# Altium PCB Board ZIP Socket.PcbDoc
Units mm, origin at the board's own origin, x right, y up, seen from the top; angles counter-clockwise.
Board outline 200 x 100 mm, 2 copper layers (Top Layer, Bottom Layer); 42 components, 40 nets, 80 pads, 0 vias.
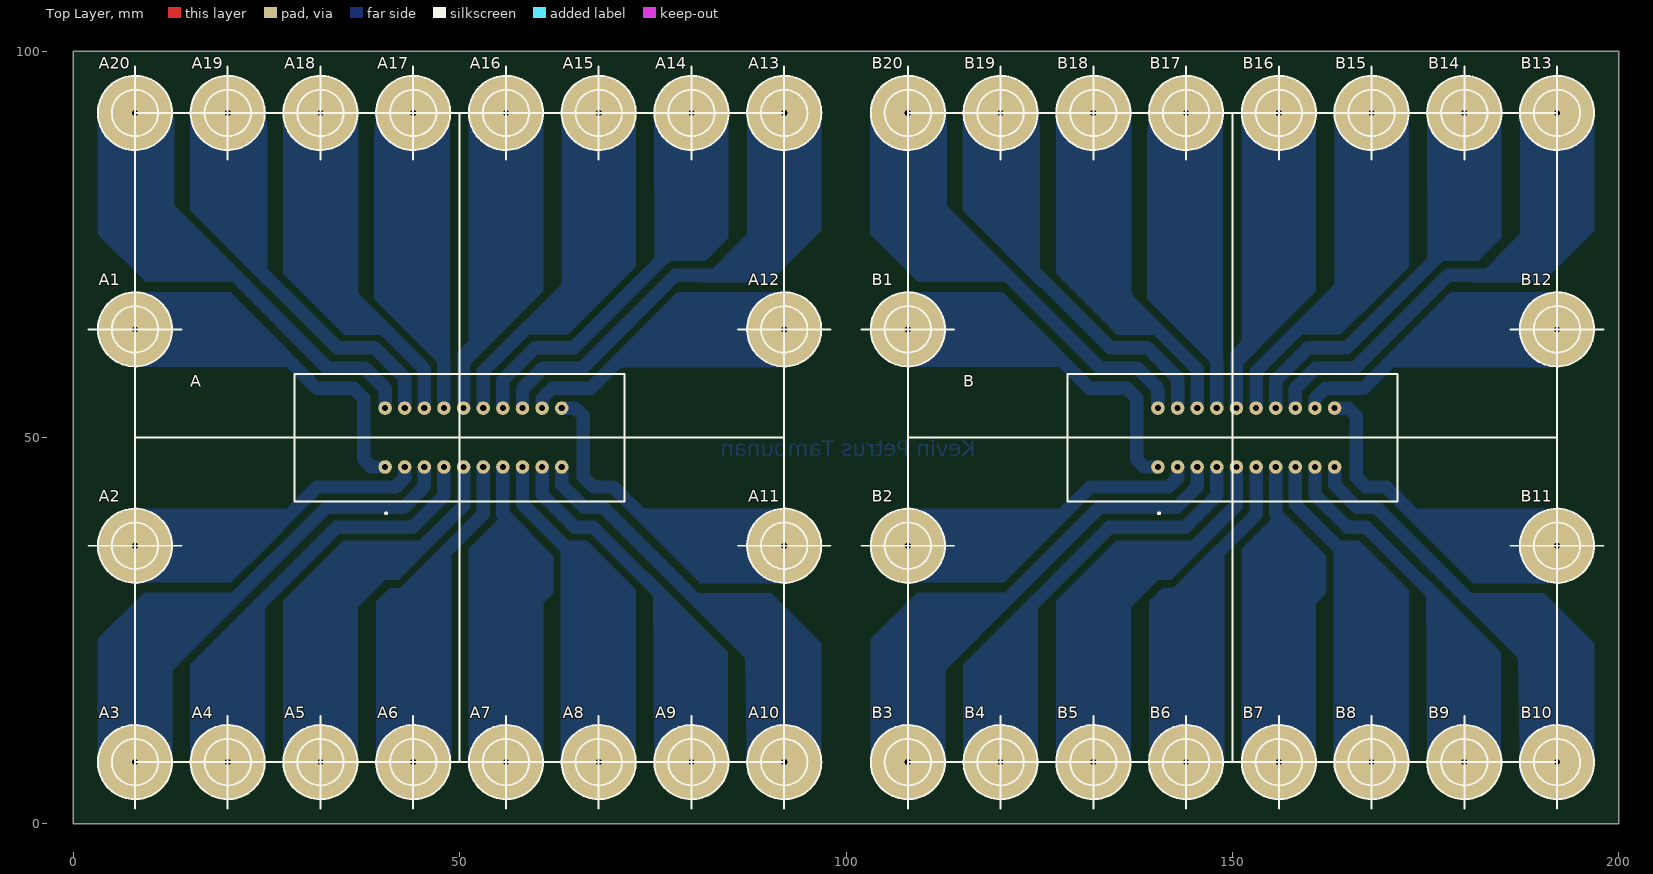
[diagram p0: Top Layer view]
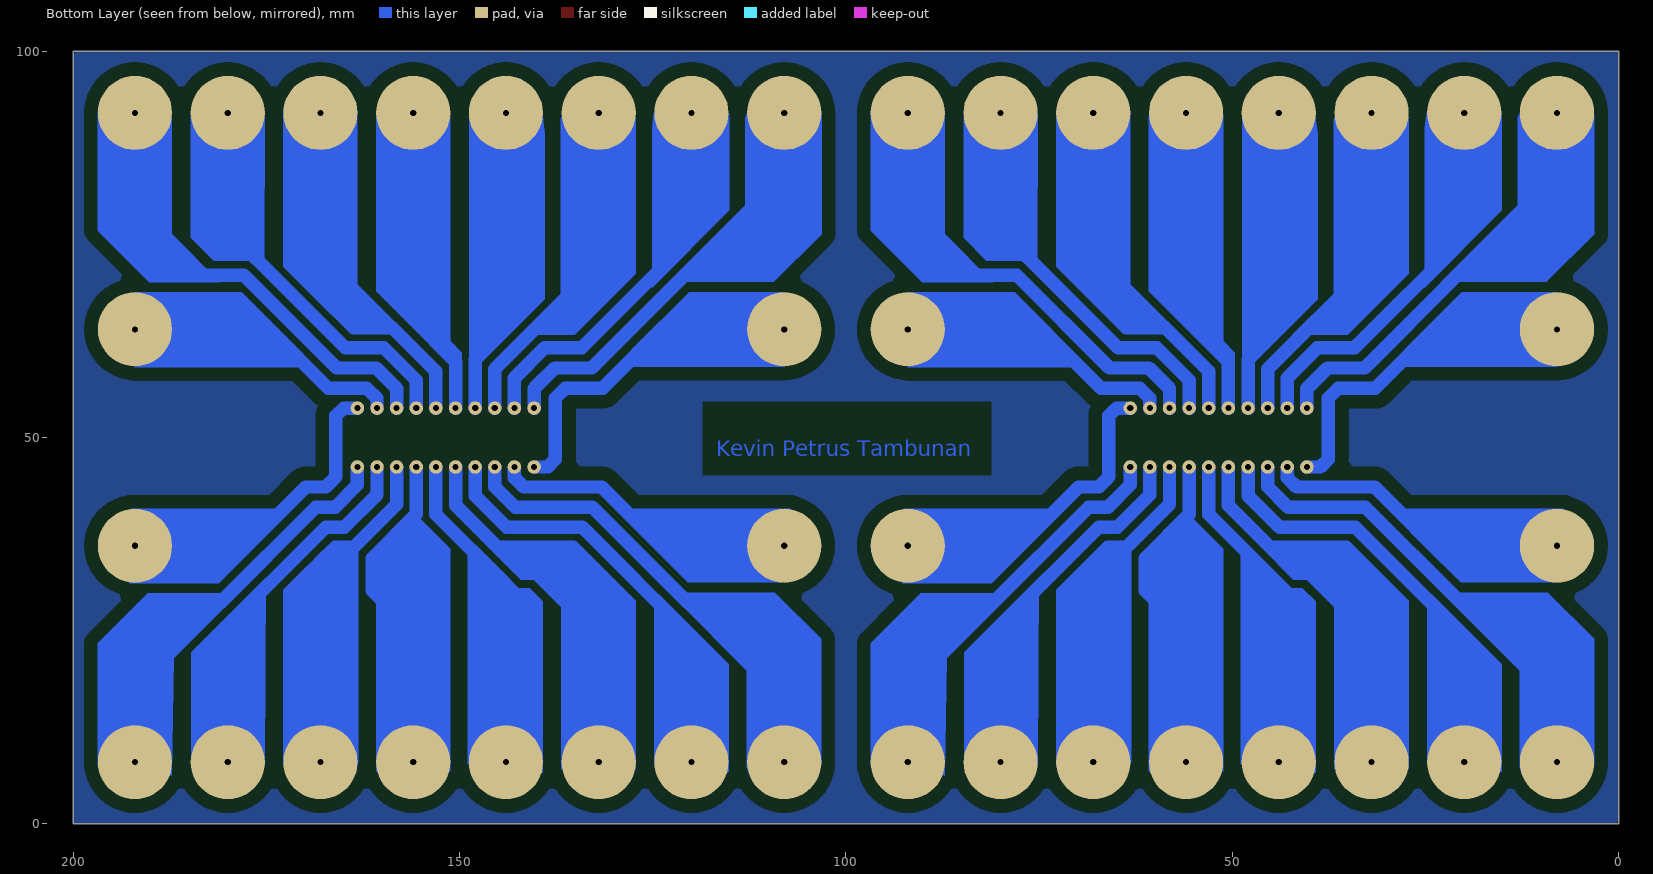
[diagram p1: Bottom Layer view, seen from below]

## Layer stack, top to bottom
Top Solder: solder mask 0.0102, Solder Resist, Dk 3.5
Top Layer: signal copper 0.0356
Dielectric 1: dielectric 0.32, FR-4, Dk 4.8
Bottom Layer: signal copper 0.0356
Bottom Solder: solder mask 0.0102, Solder Resist, Dk 3.5

## Board outline
0,0 200,0 200,100 0,100

## Design rules (kind name [scope] priority, off if disabled: settings)
Clearance [All] p1: gap=1.75 ignorepadtopadclearanceinfootprint=FALSE
PolygonConnect [All] p1: connectstyle=Relief reliefconductorwidth=0.254 reliefentries=4 polygonreliefangle="90 Angle" airgapwidth=0.254
RoutingVias [All] p1: holewidth=0.711 width=1.27 viastyle="Through Hole" minholewidth=0.711 minwidth=1.27 maxholewidth=0.711 maxwidth=1.27
SolderMaskExpansion [All] p1: expansion=0.102
Width [All] p1: maxlimit=0.254 minlimit=0.254 preferedwidth=0.254
30 further rules are at their usual default settings.

## Components (designator, comment, footprint, x,y, rotation, side; value= is the part's Value field where it differs from the comment)
A "220-3342-00-0602J" 3M_0_0 50,50 r180 top locked
A1 "Female_Connector_Banana" F_BANANA 8,64 r0 top locked
A2 "Female_Connector_Banana" F_BANANA 8,36 r0 top locked
A3 "Female_Connector_Banana" F_BANANA 8,8 r0 top locked
A4 "Female_Connector_Banana" F_BANANA 20,8 r0 top locked
A5 "Female_Connector_Banana" F_BANANA 32,8 r0 top locked
A6 "Female_Connector_Banana" F_BANANA 44,8 r0 top locked
A7 "Female_Connector_Banana" F_BANANA 56,8 r0 top locked
A8 "Female_Connector_Banana" F_BANANA 68,8 r0 top locked
A9 "Female_Connector_Banana" F_BANANA 80,8 r0 top locked
A10 "Female_Connector_Banana" F_BANANA 92,8 r0 top locked
A11 "Female_Connector_Banana" F_BANANA 92,36 r0 top locked
A12 "Female_Connector_Banana" F_BANANA 92,64 r0 top locked
A13 "Female_Connector_Banana" F_BANANA 92,92 r0 top locked
A14 "Female_Connector_Banana" F_BANANA 80,92 r0 top locked
A15 "Female_Connector_Banana" F_BANANA 68,92 r0 top locked
A16 "Female_Connector_Banana" F_BANANA 56,92 r0 top locked
A17 "Female_Connector_Banana" F_BANANA 44,92 r0 top locked
A18 "Female_Connector_Banana" F_BANANA 32,92 r0 top locked
A19 "Female_Connector_Banana" F_BANANA 20,92 r0 top locked
A20 "Female_Connector_Banana" F_BANANA 8,92 r0 top locked
B "220-3342-00-0602J" 3M_0_0 150,50 r180 top locked
B1 "Female_Connector_Banana" F_BANANA 108,64 r0 top locked
B2 "Female_Connector_Banana" F_BANANA 108,36 r0 top locked
B3 "Female_Connector_Banana" F_BANANA 108,8 r0 top locked
B4 "Female_Connector_Banana" F_BANANA 120,8 r0 top locked
B5 "Female_Connector_Banana" F_BANANA 132,8 r0 top locked
B6 "Female_Connector_Banana" F_BANANA 144,8 r0 top locked
B7 "Female_Connector_Banana" F_BANANA 156,8 r0 top locked
B8 "Female_Connector_Banana" F_BANANA 168,8 r0 top locked
B9 "Female_Connector_Banana" F_BANANA 180,8 r0 top locked
B10 "Female_Connector_Banana" F_BANANA 192,8 r0 top locked
B11 "Female_Connector_Banana" F_BANANA 192,36 r0 top locked
B12 "Female_Connector_Banana" F_BANANA 192,64 r0 top locked
B13 "Female_Connector_Banana" F_BANANA 192,92 r0 top locked
B14 "Female_Connector_Banana" F_BANANA 180,92 r0 top locked
B15 "Female_Connector_Banana" F_BANANA 168,92 r0 top locked
B16 "Female_Connector_Banana" F_BANANA 156,92 r0 top locked
B17 "Female_Connector_Banana" F_BANANA 144,92 r0 top locked
B18 "Female_Connector_Banana" F_BANANA 132,92 r0 top locked
B19 "Female_Connector_Banana" F_BANANA 120,92 r0 top locked
B20 "Female_Connector_Banana" F_BANANA 108,92 r0 top locked

## Footprints (in the part's own frame and the unit in brackets; to place one, negate y for a bottom-side part, rotate by r counter-clockwise, add the part's x,y. Pads: shape width x height; smd on the part's side, far side on the other; paste and mask are expansions set on the pad)
3M_0_0 [mm]
  round 1.75 hole 0.8 paste-1000 mask+0: 1(9.64,3.81) 2(7.1,3.81) 3(4.56,3.81) 4(2.02,3.81) 5(-0.52,3.81) 6(-3.06,3.81) 7(-5.6,3.81) 8(-8.14,3.81) 9(-10.68,3.81) 10(-13.22,3.81) 11(-13.22,-3.81) 12(-10.68,-3.81) 13(-8.14,-3.81) 14(-5.6,-3.81) 15(-3.06,-3.81) 16(-0.52,-3.81) 17(2.02,-3.81) 18(4.56,-3.81) 19(7.1,-3.81) 20(9.64,-3.81)
  silkscreen extent -21.35,-8.25 21.35,9.92, body extent -20.2,-7.62 20.2,7.6, height 24.39
F_BANANA [mm]
  round 9.6 hole 0.8: 1(0,0)
  silkscreen extent -4.8,-4.8 4.8,4.8

## Nets (pads, with @x,y where several pads share a name; then routed paths per layer and width w, separated by ;. In a path a pad name is that pad's centre, name@x,y a point inside that pad or via, vN(x,y) a via of type N, cw(c..) or ccw(c..) an arc to the next point about the centre after c; other vN are vias at no path point)
NetA1_1: A1.1 A.1 | length 44.4
  Bottom Layer w1.74: A1.1 23.9,64 31.5,56.4 36.3,56.4 37.6,55.1 37.6,47.2 38.61,46.19 A.1
NetA2_1: A2.1 A.2 | length 39.9
  Bottom Layer w1.74: A2.1 24,36 31.6,43.6 41.7,43.6 42.9,44.8 A.2
NetA3_1: A3.1 A.3 | length 66.2
  Bottom Layer w1.74: A3.1 8,27.5 9.1,28.6 20.4,28.6 32.8,41 42.8,41 45.44,43.64 A.3
NetA4_1: A4.1 A.4 | length 55.5
  Bottom Layer w1.74: A4.1 20,24.3 34.1,38.4 43.9,38.4 47.98,42.48 A.4
NetA5_1: A5.1 A.5 | length 51.6
  Bottom Layer w1.74: A5.1 32,32.5 35.3,35.8 45.1,35.8 50.52,41.22 A.5
NetA6_1: A6.1 A.6 | length 41.9
  Bottom Layer w1.74: A6.1 44,31 53.06,40.06 A.6
NetA7_1: A7.1 A.7 | length 42.7
  Bottom Layer w1.74: A.7 55.6,40.1 61.3,34.4 61.3,30.2 56,24.9 A7.1
NetA8_1: A8.1 A.8 | length 43.7
  Bottom Layer w1.74: A.8 58.14,41.36 63.7,35.8 66.1,35.8 68,33.9 A8.1
NetA9_1: A9.1 A.9 | length 47.6
  Bottom Layer w1.74: A.9 60.68,42.62 64.9,38.4 67.3,38.4 80,25.7 A9.1
NetA10_1: A10.1 A.10 | length 57
  Bottom Layer w1.74: A.10 63.22,43.88 66.1,41 68.6,41 81,28.6 90.3,28.6 92,26.9 A10.1
NetA11_1: A11.1 A.11 | length 40.8
  Bottom Layer w1.74: A.11 64.99,53.81 66,52.8 66,44.9 67.3,43.6 69.9,43.6 77.5,36 A11.1
NetA12_1: A12.1 A.12 | length 36.3
  Bottom Layer w1.74: A.12 60.68,55.08 62,56.4 67,56.4 74.6,64 A12.1
NetA13_1: A13.1 A.13 | length 62.2
  Bottom Layer w1.74: A.13 58.14,56.34 60.8,59 65.9,59 77.9,71 89.8,71 92,73.2 A13.1
NetA14_1: A14.1 A.14 | length 51.2
  Bottom Layer w1.74: A.14 55.6,57.4 59.8,61.6 64.8,61.6 80,76.8 A14.1
NetA15_1: A15.1 A.15 | length 47.3
  Bottom Layer w1.74: A.15 53.06,58.56 58.7,64.2 63.7,64.2 68,68.5 A15.1
NetA16_1: A16.1 A.16 | length 40.5
  Bottom Layer w1.74: A.16 50.52,59.82 56,65.3 A16.1
NetA17_1: A17.1 A.17 | length 39.8
  Bottom Layer w1.74: A17.1 44,64.1 47.98,60.12 A.17
NetA18_1: A18.1 A.18 | length 46.5
  Bottom Layer w1.74: A18.1 32,67.7 35.5,64.2 40.1,64.2 45.44,58.86 A.18
NetA19_1: A19.1 A.19 | length 50.5
  Bottom Layer w1.74: A19.1 20,75.8 34.2,61.6 39,61.6 42.9,57.7 A.19
NetA20_1: A20.1 A.20 | length 60.4
  Bottom Layer w1.74: A20.1 8,73.7 10.7,71 20.9,71 32.9,59 37.7,59 40.36,56.34 A.20
NetB1_1: B1.1 B.1 | length 44.4
  Bottom Layer w1.74: B1.1 123.9,64 131.5,56.4 136.3,56.4 137.6,55.1 137.6,47.2 138.61,46.19 B.1
NetB2_1: B2.1 B.2 | length 39.9
  Bottom Layer w1.74: B2.1 124,36 131.6,43.6 141.7,43.6 142.9,44.8 B.2
NetB3_1: B3.1 B.3 | length 66.2
  Bottom Layer w1.74: B3.1 108,27.5 109.1,28.6 120.4,28.6 132.8,41 142.8,41 145.44,43.64 B.3
NetB4_1: B4.1 B.4 | length 55.5
  Bottom Layer w1.74: B4.1 120,24.3 134.1,38.4 143.9,38.4 147.98,42.48 B.4
NetB5_1: B5.1 B.5 | length 51.6
  Bottom Layer w1.74: B5.1 132,32.5 135.3,35.8 145.1,35.8 150.52,41.22 B.5
NetB6_1: B6.1 B.6 | length 41.9
  Bottom Layer w1.74: B6.1 144,31 153.06,40.06 B.6
NetB7_1: B7.1 B.7 | length 42.7
  Bottom Layer w1.74: B.7 155.6,40.1 161.3,34.4 161.3,30.2 156,24.9 B7.1
NetB8_1: B8.1 B.8 | length 43.7
  Bottom Layer w1.74: B.8 158.14,41.36 163.7,35.8 166.1,35.8 168,33.9 B8.1
NetB9_1: B9.1 B.9 | length 47.6
  Bottom Layer w1.74: B.9 160.68,42.62 164.9,38.4 167.3,38.4 180,25.7 B9.1
NetB10_1: B10.1 B.10 | length 57
  Bottom Layer w1.74: B.10 163.22,43.88 166.1,41 168.6,41 181,28.6 190.3,28.6 192,26.9 B10.1
NetB11_1: B11.1 B.11 | length 40.8
  Bottom Layer w1.74: B.11 164.99,53.81 166,52.8 166,44.9 167.3,43.6 169.9,43.6 177.5,36 B11.1
NetB12_1: B12.1 B.12 | length 36.3
  Bottom Layer w1.74: B.12 160.68,55.08 162,56.4 167,56.4 174.6,64 B12.1
NetB13_1: B13.1 B.13 | length 62.2
  Bottom Layer w1.74: B.13 158.14,56.34 160.8,59 165.9,59 177.9,71 189.8,71 192,73.2 B13.1
NetB14_1: B14.1 B.14 | length 51.2
  Bottom Layer w1.74: B.14 155.6,57.4 159.8,61.6 164.8,61.6 180,76.8 B14.1
NetB15_1: B15.1 B.15 | length 47.3
  Bottom Layer w1.74: B.15 153.06,58.56 158.7,64.2 163.7,64.2 168,68.5 B15.1
NetB16_1: B16.1 B.16 | length 40.5
  Bottom Layer w1.74: B.16 150.52,59.82 156,65.3 B16.1
NetB17_1: B17.1 B.17 | length 39.8
  Bottom Layer w1.74: B17.1 144,64.1 147.98,60.12 B.17
NetB18_1: B18.1 B.18 | length 46.5
  Bottom Layer w1.74: B18.1 132,67.7 135.5,64.2 140.1,64.2 145.44,58.86 B.18
NetB19_1: B19.1 B.19 | length 50.5
  Bottom Layer w1.74: B19.1 120,75.8 134.2,61.6 139,61.6 142.9,57.7 B.19
NetB20_1: B20.1 B.20 | length 60.4
  Bottom Layer w1.74: B20.1 108,73.7 110.7,71 120.9,71 132.9,59 137.7,59 140.36,56.34 B.20

## Polygon pours and split planes (outlines as drawn)
no net on Bottom Layer "Bottom Layer-No Net" (solid, pour order 0): 200.002,100 0,100 -0.005,0 199.998,0

## Other copper
Bottom Layer:
  region net NetB20_1: 103.222,92 103.144,91.922 103.144,76.334 109.347,70.131 122.947,70.131 113.034,80.044 113.034,91.384 112.778,92
  region net NetB2_1: 125.1,35.9 120.453,31.253 108.301,31.253 107.135,40.795 127.723,40.795 128.859,39.659
  region net NetB3_1: 121.8,28.8 112.831,19.831 112.831,7.309 112.538,6.457 103.215,7.609 103.215,23.941 109.218,29.944 121.8,29.944
  region net NetB10_1: 179.6,28.8 186.979,21.421 187.221,6.271 196.049,6.724 196.812,7.487 196.812,23.363 190.351,29.824 179.6,29.824
  region net NetB9_1: 175.069,31.831 175.212,7.518 184.697,8.552 184.697,22.203
  region net NetB8_1: 172.818,7.554 172.818,30.282 166.5,36.6 166.4,36.5 163.1,36.5 163.1,29.1 163.1,8.112 163.387,6.843
  region net NetB5_1: 146.3,35.8 142.1,31.6 140.4,31.6 136.839,28.039 136.839,7.064 127.179,7.064 127.179,28.879 134.1,35.8
  region net NetB4_1: 124.799,29.7 124.799,7.656 123.885,6.742 115.176,6.742 115.176,20.676 124.2,29.7
  region net NetB6_1: 142.329,30.529 140.939,30.529 139.235,28.825 139.235,6.631 147.794,6.631 148.925,7.762 148.925,37.125
  region net NetB7_1: 154.825,6.825 151.201,6.825 151.201,35.601 155.35,39.75 161.1,34 161.1,30 160.808,29.708 160.808,6.825
  region net NetB1_1: 108,68.8 108,59.176 127.7,59.176 127.7,61.4 120.3,68.8
  region net NetB11_1: 192.731,31.168 181.132,31.168 171.489,40.811 192.509,40.811 193.925,37.397
  region net NetB19_1: 115.306,92 115.123,91.817 115.123,79.377 125.1,69.4 125.1,90.1 124.867,92
  region net NetB18_1: 142.229,63.3 136.904,68.625 136.904,91.12 136.635,92 127.708,92 127.317,91.609 127.183,91.017 127.183,71.217 135.1,63.3
  region net NetB15_1: 172.816,92.209 172.37,93.906 163.206,92.225 163.206,69.806 158.2,64.8 158.2,63.4 164.1,63.4 172.816,72.116
  region net NetB14_1: 175.205,92 175.244,72.4 176.8,72.4 177.3,72.9 181.822,72.9 184.785,75.863 184.785,91.613 184.398,92
  region net NetB12_1: 192,59.123 168.523,59.123 178.189,68.789 192,68.797
  region net NetB17_1: 139.326,92 138.99,89.299 138.99,67.91 147.2,59.7 148.715,59.7 148.715,92
  region net NetB16_1: 156,92 160.523,92 160.808,91.715 160.808,68.908 151.3,59.4 149.7,59.4 149.7,61 151.204,62.504 151.204,91.8 155.8,91.8
  region net NetB13_1: 181,70.1 187.238,76.338 187.238,91.649 188.91,92.597 192.597,92.597 194.541,94.542 196.812,92.271 196.812,76.787 190.125,70.1
  region net NetA13_1: 81,70.1 87.238,76.338 87.238,91.649 88.91,92.597 92.597,92.597 94.541,94.542 96.812,92.271 96.812,76.787 90.125,70.1
  region net NetA16_1: 56,92 60.523,92 60.808,91.715 60.808,68.908 51.3,59.4 49.7,59.4 49.7,61 51.204,62.504 51.204,91.8 55.8,91.8
  region net NetA17_1: 39.326,92 38.99,89.299 38.99,67.91 47.2,59.7 48.715,59.7 48.715,92
  region net NetA12_1: 92,59.123 68.523,59.123 78.189,68.789 92,68.797
  region net NetA14_1: 75.205,92 75.244,72.4 76.8,72.4 77.3,72.9 81.822,72.9 84.785,75.863 84.785,91.613 84.398,92
  region net NetA15_1: 72.816,92.209 72.37,93.906 63.206,92.225 63.206,69.806 58.2,64.8 58.2,63.4 64.1,63.4 72.816,72.116
  region net NetA18_1: 42.229,63.3 36.904,68.625 36.904,91.12 36.635,92 27.708,92 27.317,91.609 27.183,91.017 27.183,71.217 35.1,63.3
  region net NetA19_1: 15.306,92 15.123,91.817 15.123,79.377 25.1,69.4 25.1,90.1 24.867,92
  region net NetA20_1: 3.244,92 3.166,91.922 3.166,76.334 9.369,70.131 22.969,70.131 13.056,80.044 13.056,91.384 12.799,92
  region net NetA11_1: 92.731,31.168 81.132,31.168 71.489,40.811 92.509,40.811 93.925,37.397
  region net NetA1_1: 8,68.8 8,59.176 27.7,59.176 27.7,61.4 20.3,68.8
  region net NetA7_1: 54.825,6.825 51.201,6.825 51.201,35.601 55.35,39.75 61.1,34 61.1,30 60.808,29.708 60.808,6.825
  region net NetA6_1: 42.329,30.529 40.939,30.529 39.235,28.825 39.235,6.631 47.794,6.631 48.925,7.762 48.925,37.125
  region net NetA4_1: 24.799,29.7 24.799,7.656 23.885,6.742 15.176,6.742 15.176,20.676 24.2,29.7
  region net NetA5_1: 46.3,35.8 42.1,31.6 40.4,31.6 36.839,28.039 36.839,7.064 27.179,7.064 27.179,28.879 34.1,35.8
  region net NetA8_1: 72.818,7.554 72.818,30.282 66.5,36.6 66.4,36.5 63.1,36.5 63.1,29.1 63.1,8.112 63.387,6.843
  region net NetA9_1: 75.069,31.831 75.212,7.518 84.697,8.552 84.697,22.203
  region net NetA10_1: 79.6,28.8 86.979,21.421 87.221,6.271 96.049,6.724 96.812,7.487 96.812,23.363 90.351,29.824 79.6,29.824
  region net NetA3_1: 21.8,28.8 12.831,19.831 12.831,7.309 12.538,6.457 3.215,7.609 3.215,23.941 9.218,29.944 21.8,29.944
  region net NetA2_1: 25.1,35.9 20.453,31.253 8.301,31.253 7.135,40.795 27.723,40.795 28.859,39.659
  text "Kevin Petrus Tambunan" at 116.8,46.853 h3.5

## Silkscreen, mask and mechanical layers (free items; w line width, h text height)
Top Overlay:
  lines w0.254: 2,36 14,36 ; 2,64 14,64 ; 8,2 8,14 ; 8,50 92,50 ; 8,86 8,98 ; 20,2 20,14 ; 20,86 20,98 ; 32,2 32,14 ; 32,86 32,98 ; 44,2 44,14 ; 44,86 44,98 ; 50,8 50,92 ; 56,2 56,14 ; 56,86 56,98 ; 68,2 68,14 ; 68,86 68,98 ; 80,2 80,14 ; 80,86 80,98 ; 86,36 98,36 ; 86,64 98,64 ; 92,2 92,14 ; 92,86 92,98 ; 102,36 114,36 ; 102,64 114,64 ; 108,2 108,14 ; 108,50 192,50 ; 108,86 108,98 ; 120,2 120,14 ; 120,86 120,98 ; 132,2 132,14 ; 132,86 132,98 ; 144,2 144,14 ; 144,86 144,98 ; 150,8 150,92 ; 156,2 156,14 ; 156,86 156,98 ; 168,2 168,14 ; 168,86 168,98 ; 180,2 180,14 ; 180,86 180,98 ; 186,36 198,36 ; 186,64 198,64 ; 192,2 192,14 ; 192,86 192,98 ; 8,8 92,8 92,92 8,92 8,8 ; 108,8 192,8 192,92 108,92 108,8

## Dimensions
0,100 to 200,100 on Top Overlay
0,0 to 0,100 on Top Overlay